# Allegro board demob2_c.brd
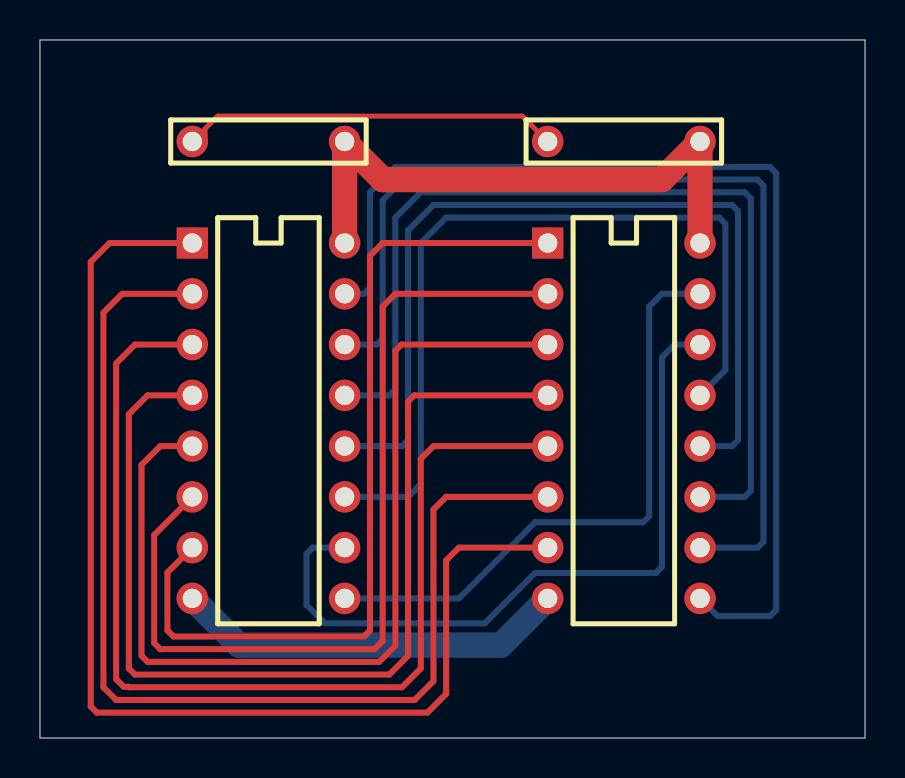
[diagram p0: board, top side]
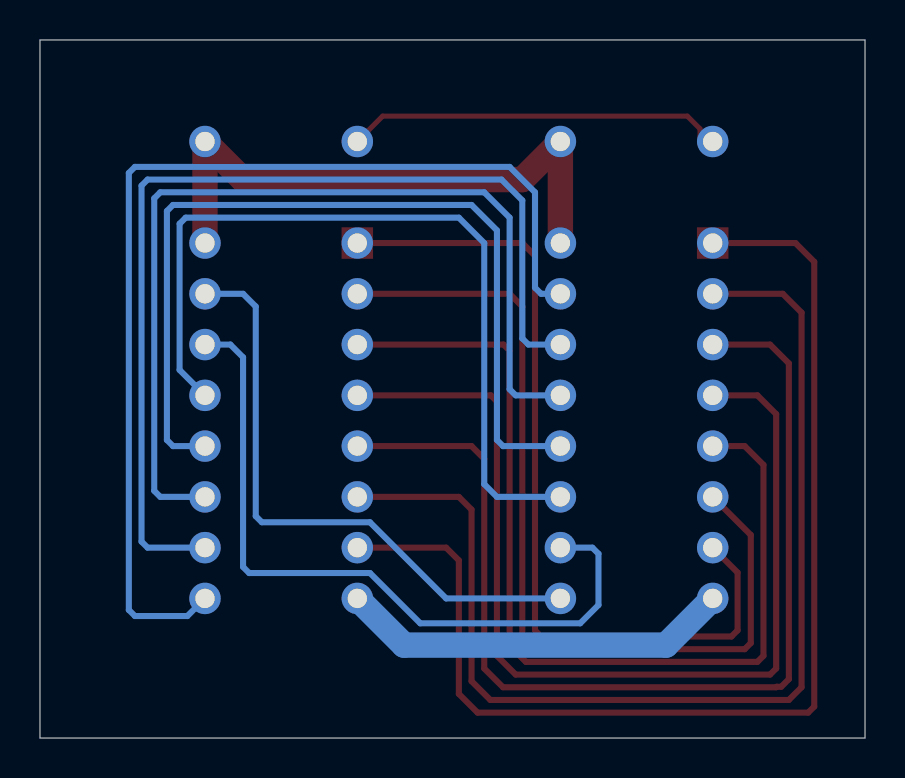
[diagram p1: board, bottom side, seen from below]

Outline 41.27 x 34.93 mm; copper layers: TOP, GND, POWER, INNER1, INNER2, BOTTOM. Coordinates in mm from the lower left corner of the outline.
Outline path: 0,34.93 41.27,34.93 41.27,0 0,0 0,34.93

## Design rules (mm)
nets with their own width: min track width 0.254; nets GND_SIGNAL
nets with their own width: min track width 0.305; nets N01899 N01900 N01901 N01902 N01903 N01904 N01905 N01906 N01907 N01908 N01909 N01910 N01911 N01912
nets with their own width: min track width 1.27; nets GND VCC

## Placement (name value [footprint] x y rotation side)
C1  CAP NP  [AC300100A]  15.24 29.85 180 top
C2  CAP NP  [AC300100A]  33.02 29.85 180 top
U1  74LS158  [DIP16]  7.62 24.77 270 top
U2  74LS158  [DIP16]  25.4 24.77 270 top

## Library data of the parts
C1 C2 = CAP_NP
U1 U2 = 74LS158

## Footprints (pads in the part's own frame, mm; a bottom-side part is the same pattern mirrored in y, then rotated)
AC300100A
  round 1.575 hole 0.965: 1(0,0) 2(7.62,0)
DIP16
  rect 1.575x1.575 hole 0.965: 1(0,0)
  round 1.575 hole 0.965: 2(2.54,0) 3(5.08,0) 4(7.62,0) 5(10.16,0) 6(12.7,0) 7(15.24,0) 8(17.78,0) 9(17.78,7.62) 10(15.24,7.62) 11(12.7,7.62) 12(10.16,7.62) 13(7.62,7.62) 14(5.08,7.62) 15(2.54,7.62) 16(0,7.62)

## Nets
GND: U1.8(TP-8) U2.8(TP-8)
GND_SIGNAL: C1.2(TP-2) C2.2(TP-2)
VCC: C1.1(TP-1) C2.1(TP-1) U1.16(TP-16) U2.16(TP-16)
N01899: U1.2(TP-2) U2.6(TP-6)
N01900: U1.3(TP-3) U2.5(TP-5)
N01901: U1.4(TP-4) U2.4(TP-4)
N01902: U1.5(TP-5) U2.3(TP-3)
N01903: U1.6(TP-6) U2.2(TP-2)
N01904: U1.7(TP-7) U2.1(TP-1)
N01905: U1.9(TP-9) U2.15(TP-15)
N01906: U1.10(TP-10) U2.14(TP-14)
N01907: U1.11(TP-11) U2.13(TP-13)
N01908: U1.12(TP-12) U2.12(TP-12)
N01909: U1.14(TP-14) U2.10(TP-10)
N01910: U1.1(TP-1) U2.7(TP-7)
N01911: U1.13(TP-13) U2.11(TP-11)
N01912: U1.15(TP-15) U2.9(TP-9)

## Routing (per net, layer and track width the routed paths; a pad name or vN(x,y) marks a point on that pad's centre or on a via; arc(x,y) is an arc through that point)
GND: length 19.7
  BOTTOM w1.27: U1.8 9.96,4.65 23.06,4.65 U2.8
GND_SIGNAL: length 19.1
  TOP w0.254: C1.2 8,29.85 8.26,30.1 8.26,30.48 8.89,31.11 24.13,31.11 C2.2
VCC: length 29.5
  TOP w1.27: U1.16 C1.1 17.14,27.94 31.11,27.94 C2.1 U2.16
N01899: length 55.3
  TOP w0.305: U2.6 20.32,12.07 19.68,11.43 19.68,2.84 18.75,1.91 3.81,1.91 3.17,2.54 3.17,21.29 4.11,22.22 U1.2
N01900: length 52.9
  TOP w0.305: U1.3 4.75,19.68 3.81,18.75 3.81,2.95 4.19,2.57 4.42,2.57 4.45,2.54 18.11,2.54 19.05,3.48 19.05,13.97 19.68,14.61 U2.5
N01901: length 50.6
  TOP w0.305: U2.4 18.72,17.14 18.41,16.84 18.41,4.11 17.48,3.17 4.75,3.17 4.45,3.48 4.45,16.21 5.38,17.14 U1.4
N01902: length 48.1
  TOP w0.305: U2.3 18.08,19.68 17.78,19.38 17.78,4.62 16.97,3.81 5.38,3.81 5.08,4.11 5.08,13.67 6.02,14.61 U1.5
N01903: length 45.1
  TOP w0.305: U2.2 17.78,22.22 17.14,21.59 17.14,4.85 16.74,4.45 6.02,4.45 5.71,4.75 5.71,10.16 U1.6
N01904: length 42.9
  TOP w0.305: U1.7 6.38,8.28 6.38,5.38 6.68,5.08 16.21,5.08 16.51,5.38 16.51,24.13 17.14,24.77 U2.1
N01905: length 30.2
  BOTTOM w0.305: U2.15 31.11,22.22 30.48,21.59 30.48,11.1 30.18,10.8 24.77,10.8 20.95,6.99 U1.9
N01906: length 36.6
  BOTTOM w0.305: U2.14 31.75,19.68 31.11,19.05 31.11,8.56 30.81,8.25 24.77,8.25 22.25,5.74 14.25,5.74 13.34,6.65 13.34,9.22 13.64,9.52 U1.10
N01907: length 41.1
  BOTTOM w0.305: U2.13 34.29,18.41 34.29,25.73 33.99,26.04 20.32,26.04 19.05,24.77 19.05,12.7 18.41,12.07 U1.11
N01908: length 44.4
  BOTTOM w0.305: U2.12 34.62,14.61 34.92,14.91 34.92,26.37 34.62,26.67 19.68,26.67 18.41,25.4 18.41,14.91 18.11,14.61 U1.12
N01909: length 49.7
  BOTTOM w0.305: U1.14 16.84,19.68 17.14,19.99 17.14,26.9 18.19,27.94 35.89,27.94 36.2,27.64 36.2,9.83 35.89,9.52 U2.10
N01910: length 58
  TOP w0.305: U2.7 20.95,9.52 20.32,8.89 20.32,2.21 19.38,1.27 2.84,1.27 2.54,1.57 2.54,23.83 3.48,24.77 U1.1
N01911: length 47
  BOTTOM w0.305: U2.11 35.26,12.07 35.56,12.37 35.56,27 35.26,27.3 19.05,27.3 17.78,26.04 17.78,17.45 17.48,17.14 U1.13
N01912: length 53.3
  BOTTOM w0.305: U1.15 16.21,22.22 16.51,22.53 16.51,27.3 17.78,28.57 36.53,28.57 36.83,28.27 36.83,6.41 36.53,6.1 33.9,6.1 U2.9
